# Altium PCB MacrohardPCB_first.PcbDoc
Units mil, origin at the board's own origin, x right, y up, seen from the top; angles counter-clockwise.
Board outline 6000 x 5000 mil, 2 copper layers (Top Layer, Bottom Layer); 3 components, 0 nets, 5 pads, 4 vias.
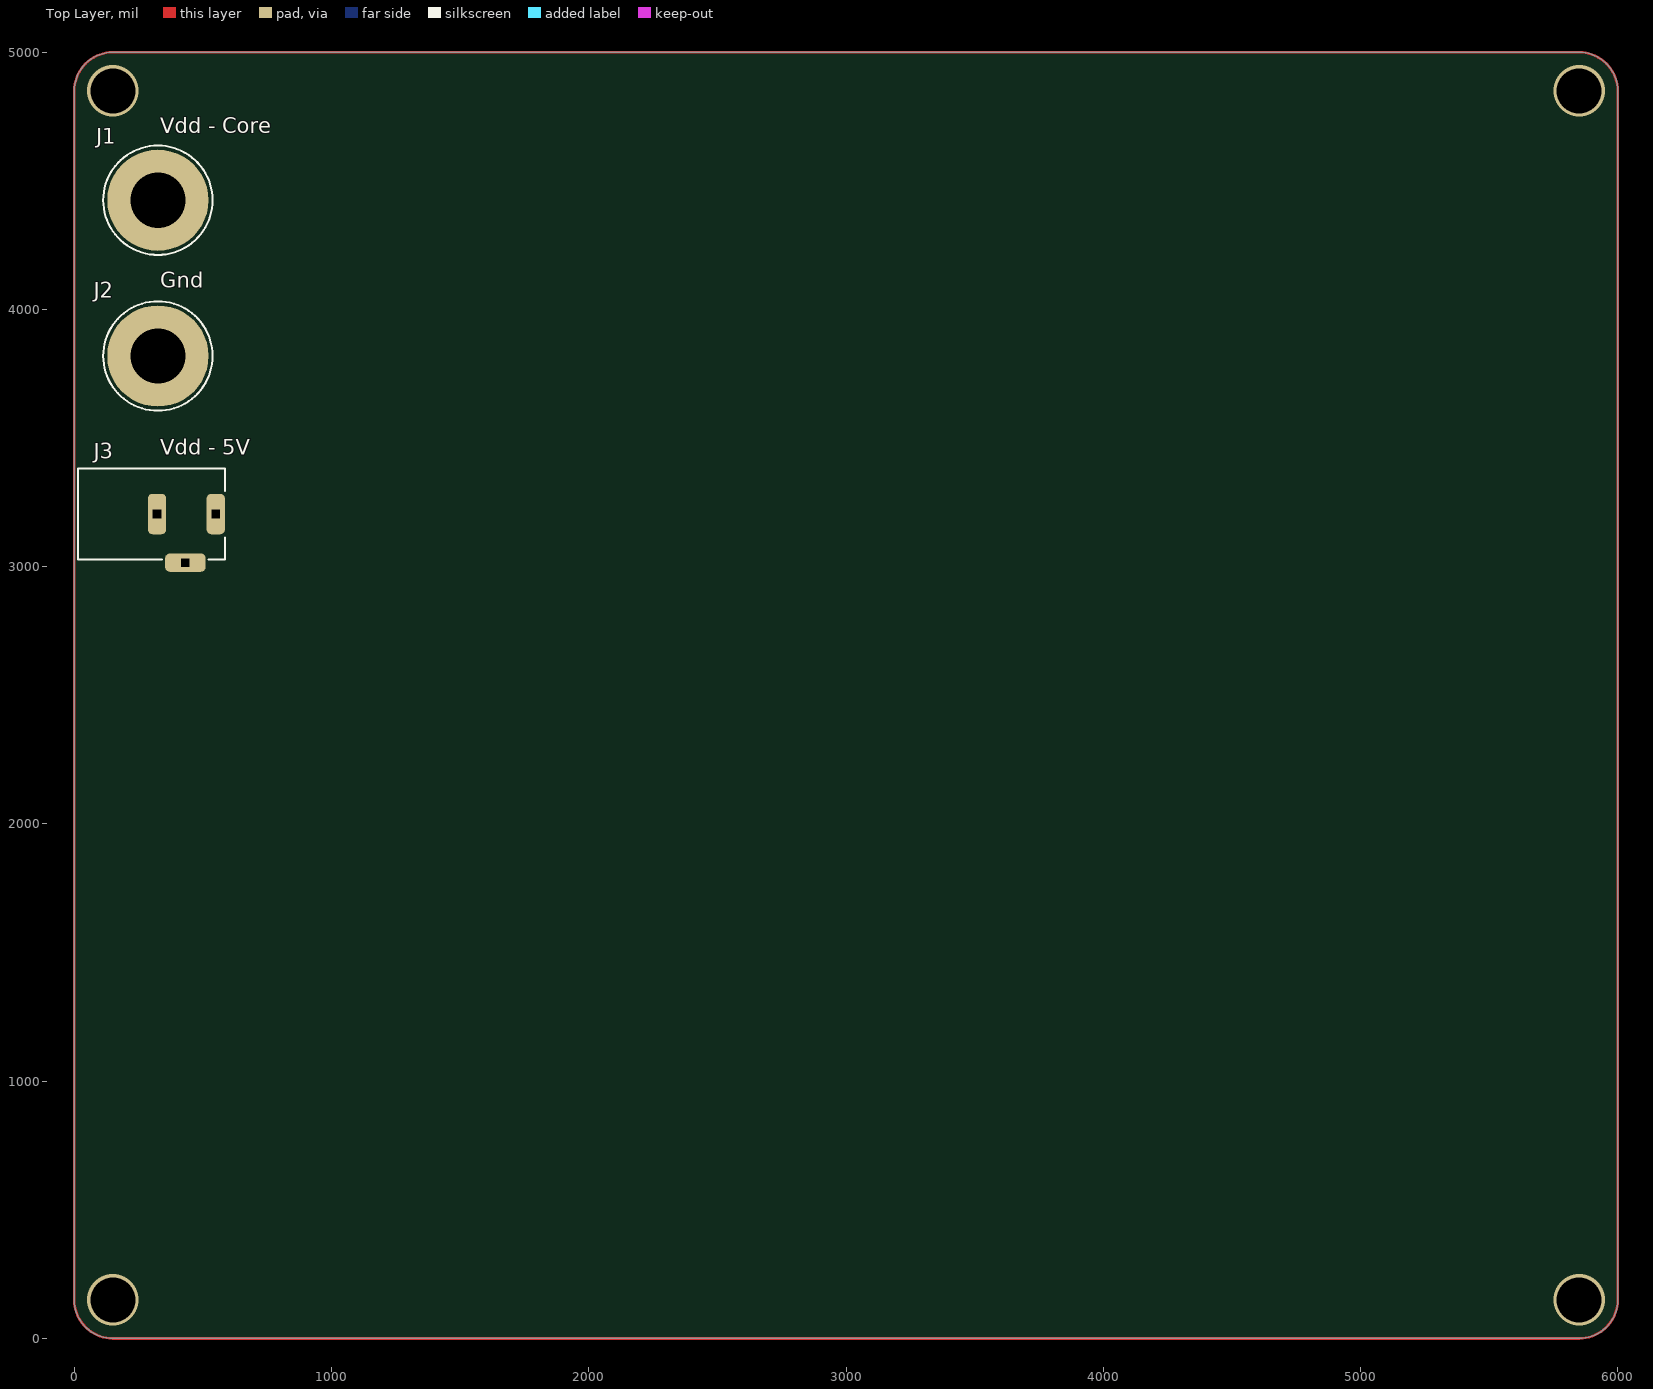
[diagram p0: Top Layer view]
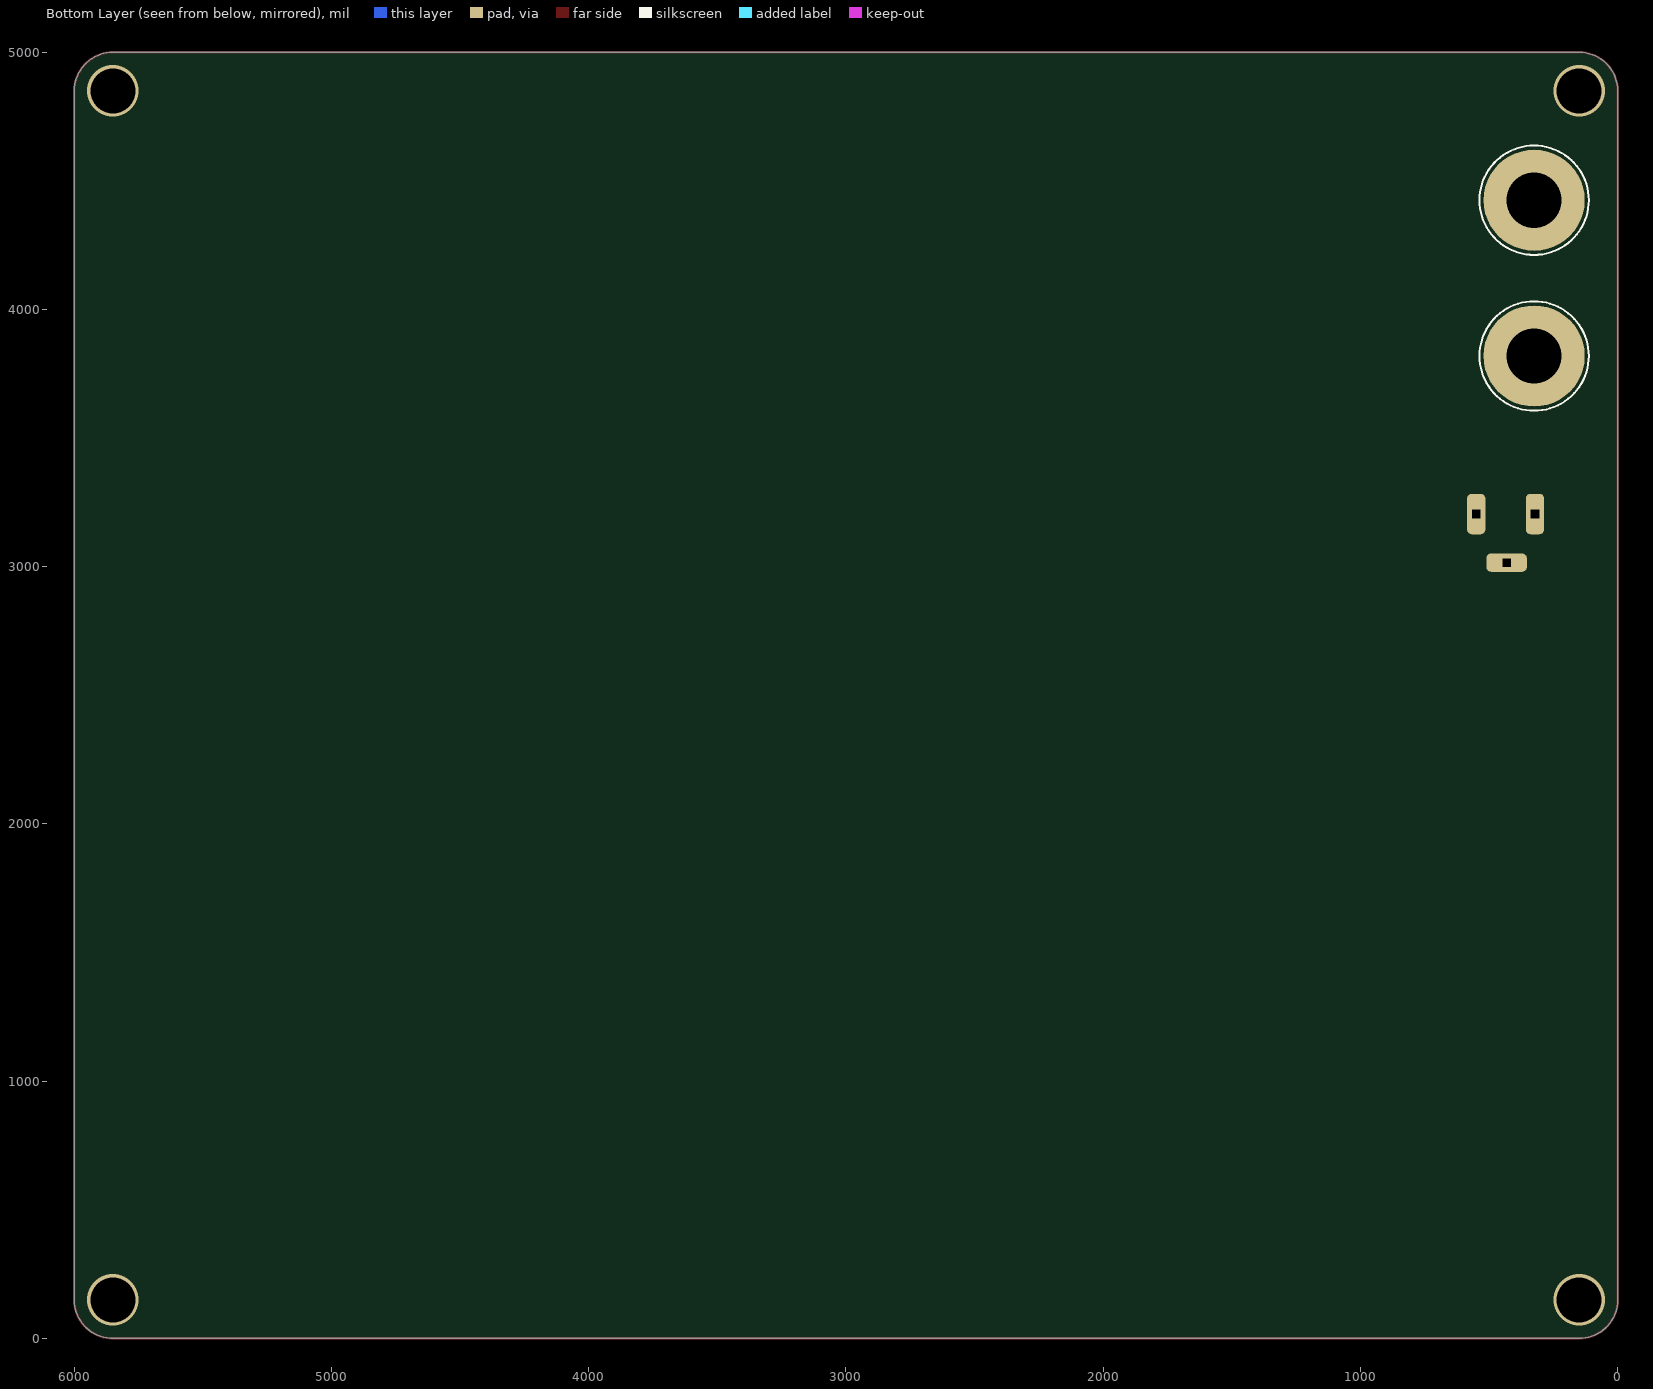
[diagram p1: Bottom Layer view, seen from below]

## Layer stack, top to bottom
Top Solder: solder mask 0.4, Solder Resist, Dk 3.5
Top Layer: signal copper 1.4
Dielectric 1: dielectric 12.6, FR-4, Dk 4.8
Bottom Layer: signal copper 1.4
Bottom Solder: solder mask 0.4, Solder Resist, Dk 3.5

## Board outline
150,0 cw(c150,150) 0,150 0,4850 cw(c150,4850) 150,5000 5850,5000 cw(c5850,4850) 6000,4850 6000,150 cw(c5850,150) 5850,0

## Design rules (kind name [scope] priority, off if disabled: settings)
Clearance [All] p1: gap=10 ignorepadtopadclearanceinfootprint=FALSE
PolygonConnect [All] p1: connectstyle=Relief reliefconductorwidth=10 reliefentries=4 polygonreliefangle="90 Angle" airgapwidth=10
RoutingVias [All] p1: holewidth=28 width=50 viastyle="Through Hole" minholewidth=28 minwidth=50 maxholewidth=28 maxwidth=50
SolderMaskExpansion [All] p1: expansion=4 istentingtop=FALSE
Width [All] p1: maxlimit=10 minlimit=10 preferedwidth=10
30 further rules are at their usual default settings.

## Components (designator, comment, footprint, x,y, rotation, side; value= is the part's Value field where it differs from the comment)
J1 "575-4" KSTN-575-4 325,4425 r0 top
J2 "575-4" KSTN-575-4 325,3819.36 r0 top
J3 "694108301002" 694108301002 300,3205 r270 top

## Footprints (in the part's own frame and the unit in brackets; to place one, negate y for a bottom-side part, rotate by r counter-clockwise, add the part's x,y. Pads: shape width x height; smd on the part's side, far side on the other; paste and mask are expansions set on the pad)
694108301002 [mm] "DC Power Jack Right Angled(6.4)"
  rrect50% 4x1.8 hole 0.8 square: 1(0,6.35) 2(0,0.55)
  rrect50% 1.8x4 hole 0.8 square: 3(4.8,3.35)
  silkscreen extent -4.5,-7.25 4.5,7.25, body extent -4.5,-7.25 5,7.25, height 10.75
KSTN-575-4 [mm] "Banana Jack, Non-Insulated, Dia 7.92mm"
  round 10 hole 5.45: 1(0,0)
  silkscreen extent -5.4,-5.4 5.4,5.4, body extent -3.98,-3.96 3.92,3.94, height 2.36

## Part data
J1 J2: library part CMP-2000-05649-1, "Banana Jack, Non-Insulated, 1-Pin THD, RoHS, Bulk", Color=-, Manufacturer=Keystone-Electronics, Package Description="1-Pin Through Hole Device, Dia 7.92 mm", Package Version="Rev. B, 11/1994", Body Material=-, Category=Connectors,Interconnects, Contact Finish=Nickel, Contact Material=Brass, Datasheet URL=http://www.keyelco.com/product-pdf.cfm?p=2379, Datasheet Version="Rev. B, 11/1994", Family=BananaandTipConnectors-Jacks,Plugs, Features=-, Gender=Female, Insulation=Non-Insulated, Manufacturer URL=http://www.keyelco.com/, Mounting Technology=ThroughHole, Mounting Type=ThroughHole, Operating Temperature=-, Package Reference=575-4, Package URL=http://www.keyelco.com/product-pdf.cfm?p=2379, Packaging=Bulk, Plug/Mating Plug Diameter=StandardBanana, Series=-, Termination=Solder, Type=BananaJack, Wire Gauge=-
J3: library part CMP-1502-00190-3, Color=Black, Current Rating=5A, Flammability Rating="UL94 V-0", Insulation Resistance=100MΩ, Max Operating Temperature=85°C, Min Operating Temperature=-40°C, Operating Supply Voltage=24V, Voltage Rating (DC)=20V, Connector Type=Power, Contact Gender=Female, Contact Material="Gold, Tin", Contact Plating=Tin, Gender=Male, Height=11mm, Housing Material=Polyamide, Mount="Through Hole", NexarPartId=52676102, Number of Contacts=3, Packaging=Bulk, REACH SVHC=Unknown, RoHS=Compliant, Shielding=Unshielded, Termination="Through Hole", Voltage Rating=24V

## Via types
v1: diameter 200, hole 175, Top Layer to Bottom Layer, 4 vias

## Nets (pads, with @x,y where several pads share a name; then routed paths per layer and width w, separated by ;. In a path a pad name is that pad's centre, name@x,y a point inside that pad or via, vN(x,y) a via of type N, cw(c..) or ccw(c..) an arc to the next point about the centre after c; other vN are vias at no path point)
pads on no net: J1.1 J2.1 J3.1 J3.2 J3.3
copper on no net: | length 21742.5
  Top Layer w10: 0,150 ccw(c150,150) 150,0 5850,0 ccw(c5850,150) 6000,150 6000,4850 ccw(c5850,4850) 5850,5000 150,5000 ccw(c150,4850) 0,4850 0,150
  other v1: 150,150 5850,150 150,4850 5850,4850

## Silkscreen, mask and mechanical layers (free items; w line width, h text height)
Top Overlay:
  text "Vdd - Core" at 335,4685 h60
  text "Gnd" at 335,4085 h60
  text "Vdd - 5V" at 335,3435 h60